# Altium PCB MakerCard.PcbDoc
Units mil, origin at the board's own origin, x right, y up, seen from the top; angles counter-clockwise.
Board outline 3500 x 2000 mil, 2 copper layers (Top Layer, Bottom Layer); 5 components, 6 nets, 24 pads, 0 vias.
Unrouted connection lines stored in the file: 10.
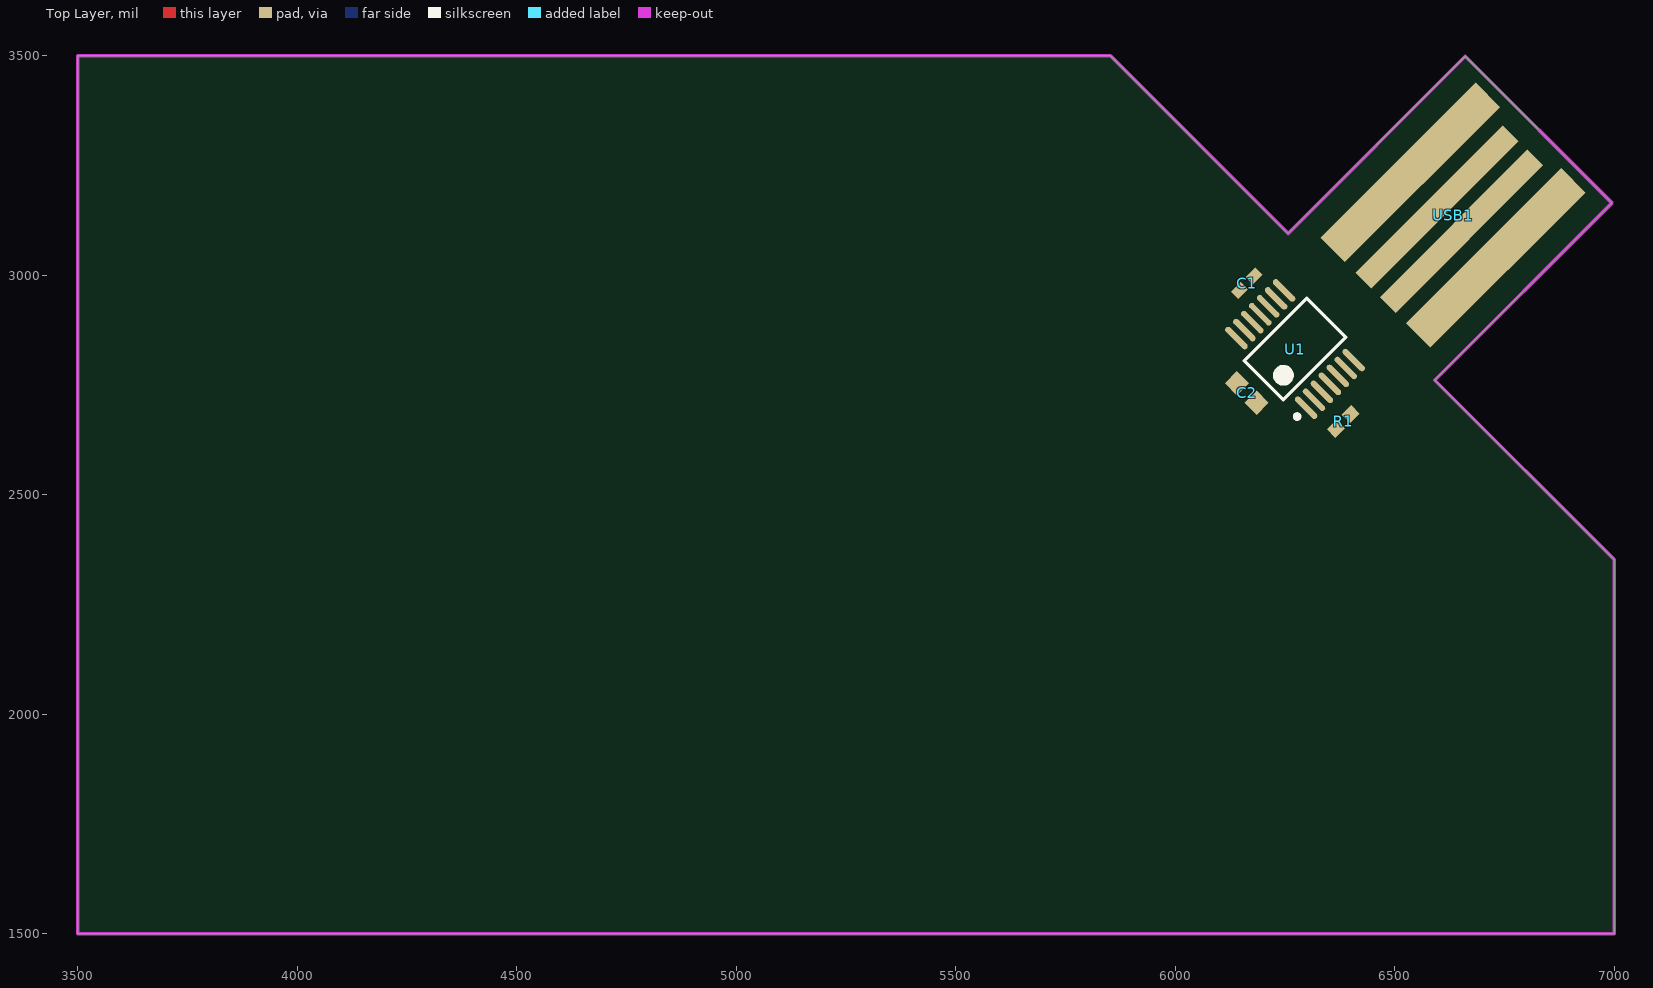
[diagram p0: Top Layer view]
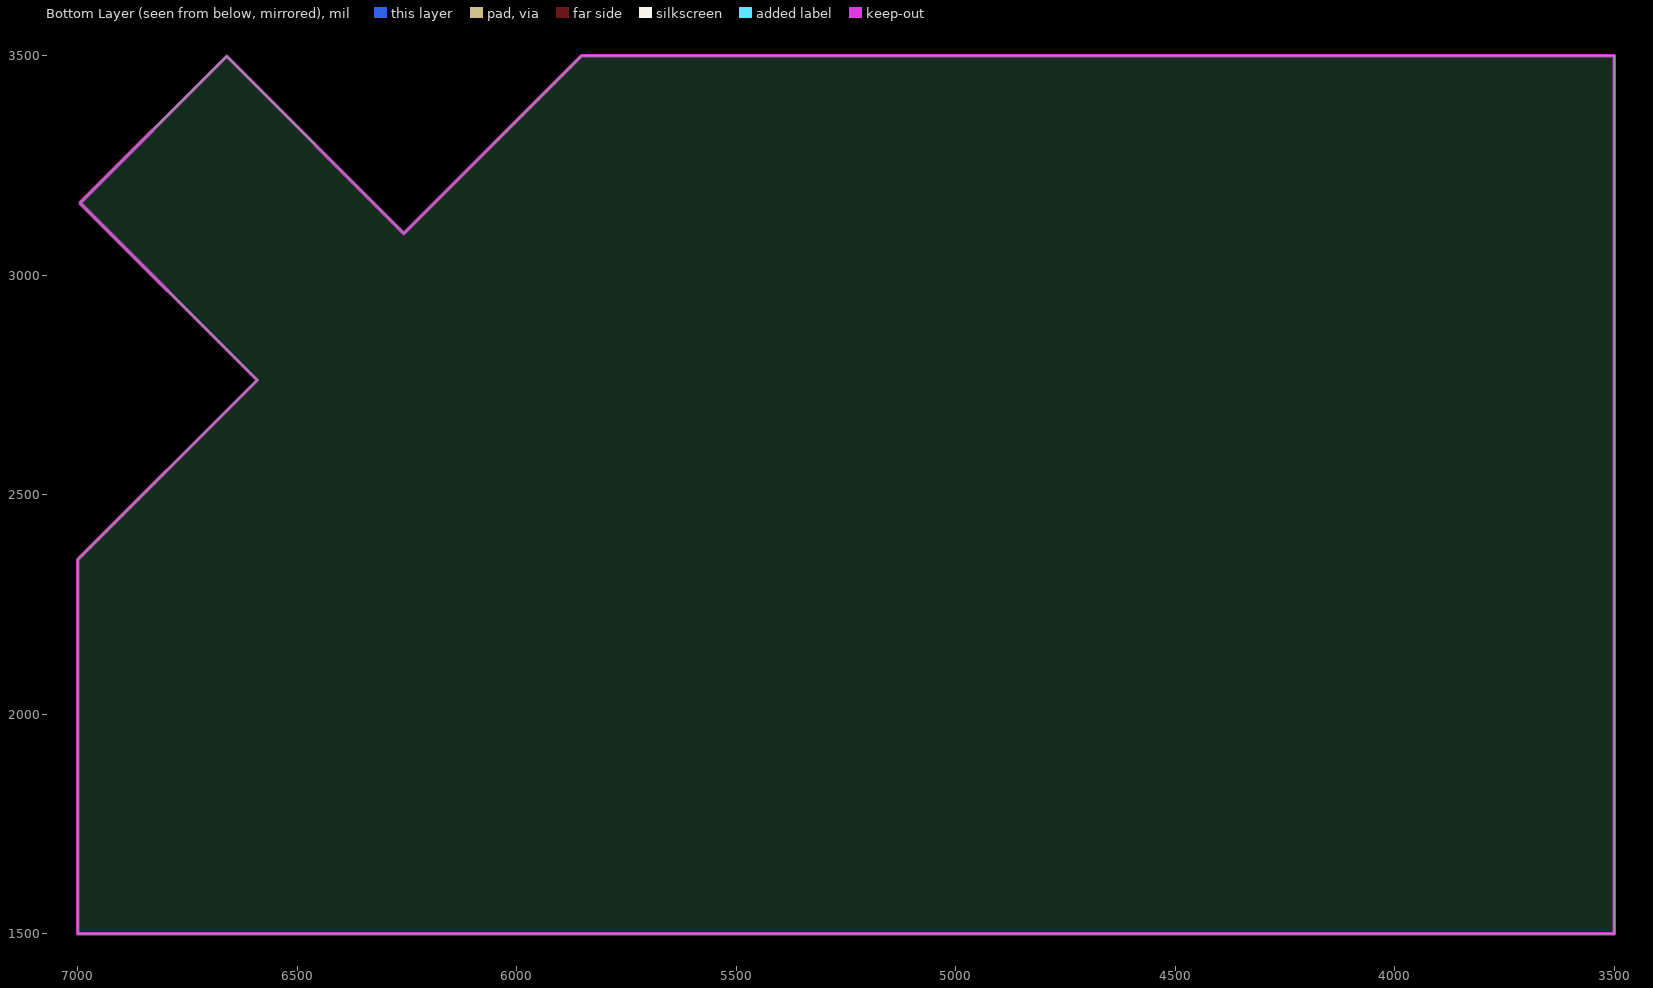
[diagram p1: Bottom Layer view, seen from below]

## Layer stack, top to bottom
Top Solder: solder mask 0.4, Solder Resist, Dk 3.5
Top Layer: signal copper 1.4
Dielectric 1: dielectric 12.6, FR-4, Dk 4.8
Bottom Layer: signal copper 1.4
Bottom Solder: solder mask 0.4, Solder Resist, Dk 3.5

## Board outline
3500,3500 5852.42,3500 6257.18,3095.24 6660.84,3498.91 6994.91,3164.84 6591.24,2761.18 7000,2352.42 7000,1505 7000,1500 3500,1500

## Design rules (kind name [scope] priority, off if disabled: settings)
Clearance [All] p1: gap=6
ComponentClearance [All] p1: gap=0 collisioncheckmode=3 verticalgap=0 showdistances=FALSE
DiffPairsRouting [All] p1: maxlimit=10 minlimit=6 mostfreqgap=10 toplayer_minwidth=6 toplayer_maxwidth=15 toplayer_prefwidth=8 bottomlayer_minwidth=6 bottomlayer_maxwidth=15 bottomlayer_prefwidth=8 maxuncoupledlength=500
HoleSize [All] p1: absolutevalues=TRUE maxlimit=500 minlimit=12 maxpercent=80.000 minpercent=20.000
PlaneConnect [All] p1: planeconnectstyle=Direct reliefexpansion=20 reliefentries=4 reliefconductorwidth=10 reliefairgap=10
PolygonConnect [All] p1: connectstyle=Direct reliefconductorwidth=10 reliefentries=4 polygonreliefangle="90 Angle" airgapwidth=10
RoutingVias [All] p1: holewidth=12 width=24 viastyle="Through Hole" minholewidth=12 minwidth=24 maxholewidth=28 maxwidth=50
SolderMaskExpansion [All] p1: expansion=0
Width [All] p1: maxlimit=500 minlimit=6 preferedwidth=8
25 further rules are at their usual default settings.

## Components (designator, comment, footprint, x,y, rotation, side; value= is the part's Value field where it differs from the comment)
C1 "220n" CAPC1005N 6163,2982 r225 top
C2 "1u" CAPC1608N 6163,2732 r315 top
R1 "1k" RESC1005N 6383,2667 r225 top
U1 "PIC16F1454-I/ST" TSOP65P640-14AN 6273,2832 r135 top
USB1 "USB A Plug" USB_A_EDGECONNECTOR 6633,3137 r315 top

## Footprints (in the part's own frame and the unit in brackets; to place one, negate y for a bottom-side part, rotate by r counter-clockwise, add the part's x,y. Pads: shape width x height; smd on the part's side, far side on the other; paste and mask are expansions set on the pad)
CAPC1005N [mm] "Chip Capacitor (0402), Body 1.0x0.5mm, IPC Medium Density"
  rect 0.8x0.6 smd: 1(-0.6,0) 2(0.6,0)
  body extent -0.5,-0.3 0.5,0.3, height 0.2
CAPC1608N [mm] "Chip Capacitor (0603), Body 1.6x0.8mm, IPC Medium Density"
  rect 1x1 smd: 1(-0.8,0) 2(0.8,0)
  body extent -1,-0.39 1,0.39, height 0.79
RESC1005N [mm] "Chip Resistor, Body 1.1x0.5mm, IPC Medium Density"
  rect 0.8x0.7 smd: 1(-0.6,0) 2(0.6,0)
  body extent -0.5,-0.25 0.5,0.25, height 0.38
TSOP65P640-14AN [mm] "TSOP, 14-Leads, Body 5x4.4mm, Pitch 0.65mm, IPC Medium Density"
  oval 1.7x0.35 smd: 1(-2.85,1.95) 2(-2.85,1.3) 3(-2.85,0.65) 4(-2.85,0) 5(-2.85,-0.65) 6(-2.85,-1.3) 7(-2.85,-1.95) 8(2.85,-1.95) 9(2.85,-1.3) 10(2.85,-0.65) 11(2.85,0) 12(2.85,0.65) 13(2.85,1.3) 14(2.85,1.95)
  silkscreen extent -2.97,-2.55 1.6,2.8, body extent -3.23,-2.55 3.23,2.55, height 1.25
USB_A_EDGECONNECTOR [mm] "USB A Edge Connector"
  rect 2x12.7 smd: 1(-3.5,0) 4(3.5,0)
  rect 1.3x12.065 smd: 2(-1,-0.318) 3(1,-0.318)
  Keep-Out Layer lines w0.203: -6,-7.5 -6,7 6,7 6,-7.5

## Part data
C1 C2: library part "Cap Semi", "Capacitor (Semiconductor SIM Model)"
R1: library part "Res Semi", "Semiconductor Resistor"
U1: "8-bit Microcontrollers - MCU 7 KB Flash 512 bytes RAM 48 MHz Int Osc"

## Nets (pads, with @x,y where several pads share a name; then routed paths per layer and width w, separated by ;. In a path a pad name is that pad's centre, name@x,y a point inside that pad or via, vN(x,y) a via of type N, cw(c..) or ccw(c..) an arc to the next point about the centre after c; other vN are vias at no path point)
5V: C2.2 R1.2 U1.1 USB1.1
GND: C1.1 C2.1 U1.14 USB1.4
NetC1_2: C1.2 U1.11
NetR1_1: R1.1 U1.4
NetU1_12: U1.12 USB1.2
NetU1_13: U1.13 USB1.3
pads on no net: U1.2 U1.3 U1.5 U1.6 U1.7 U1.8 U1.9 U1.10

## Keep-outs
Keep-Out Layer:
  lines w8: 6257.18,3095.24 5852.42,3500 3500,3500 3500,1500 7000,1500 7000,2352.42 6591.24,2761.18